# Altium PCB PCB2.PcbDoc (part 4 of 4)
Units mm, origin at the board's own origin, x right, y up, seen from the top; angles counter-clockwise.
Board outline 100 x 100 mm, 4 copper layers (TOP-SIG, GND1, GND2, BOT-SIG), stack 1.586 mm thick; 331 components, 152 nets, 869 pads, 934 vias.
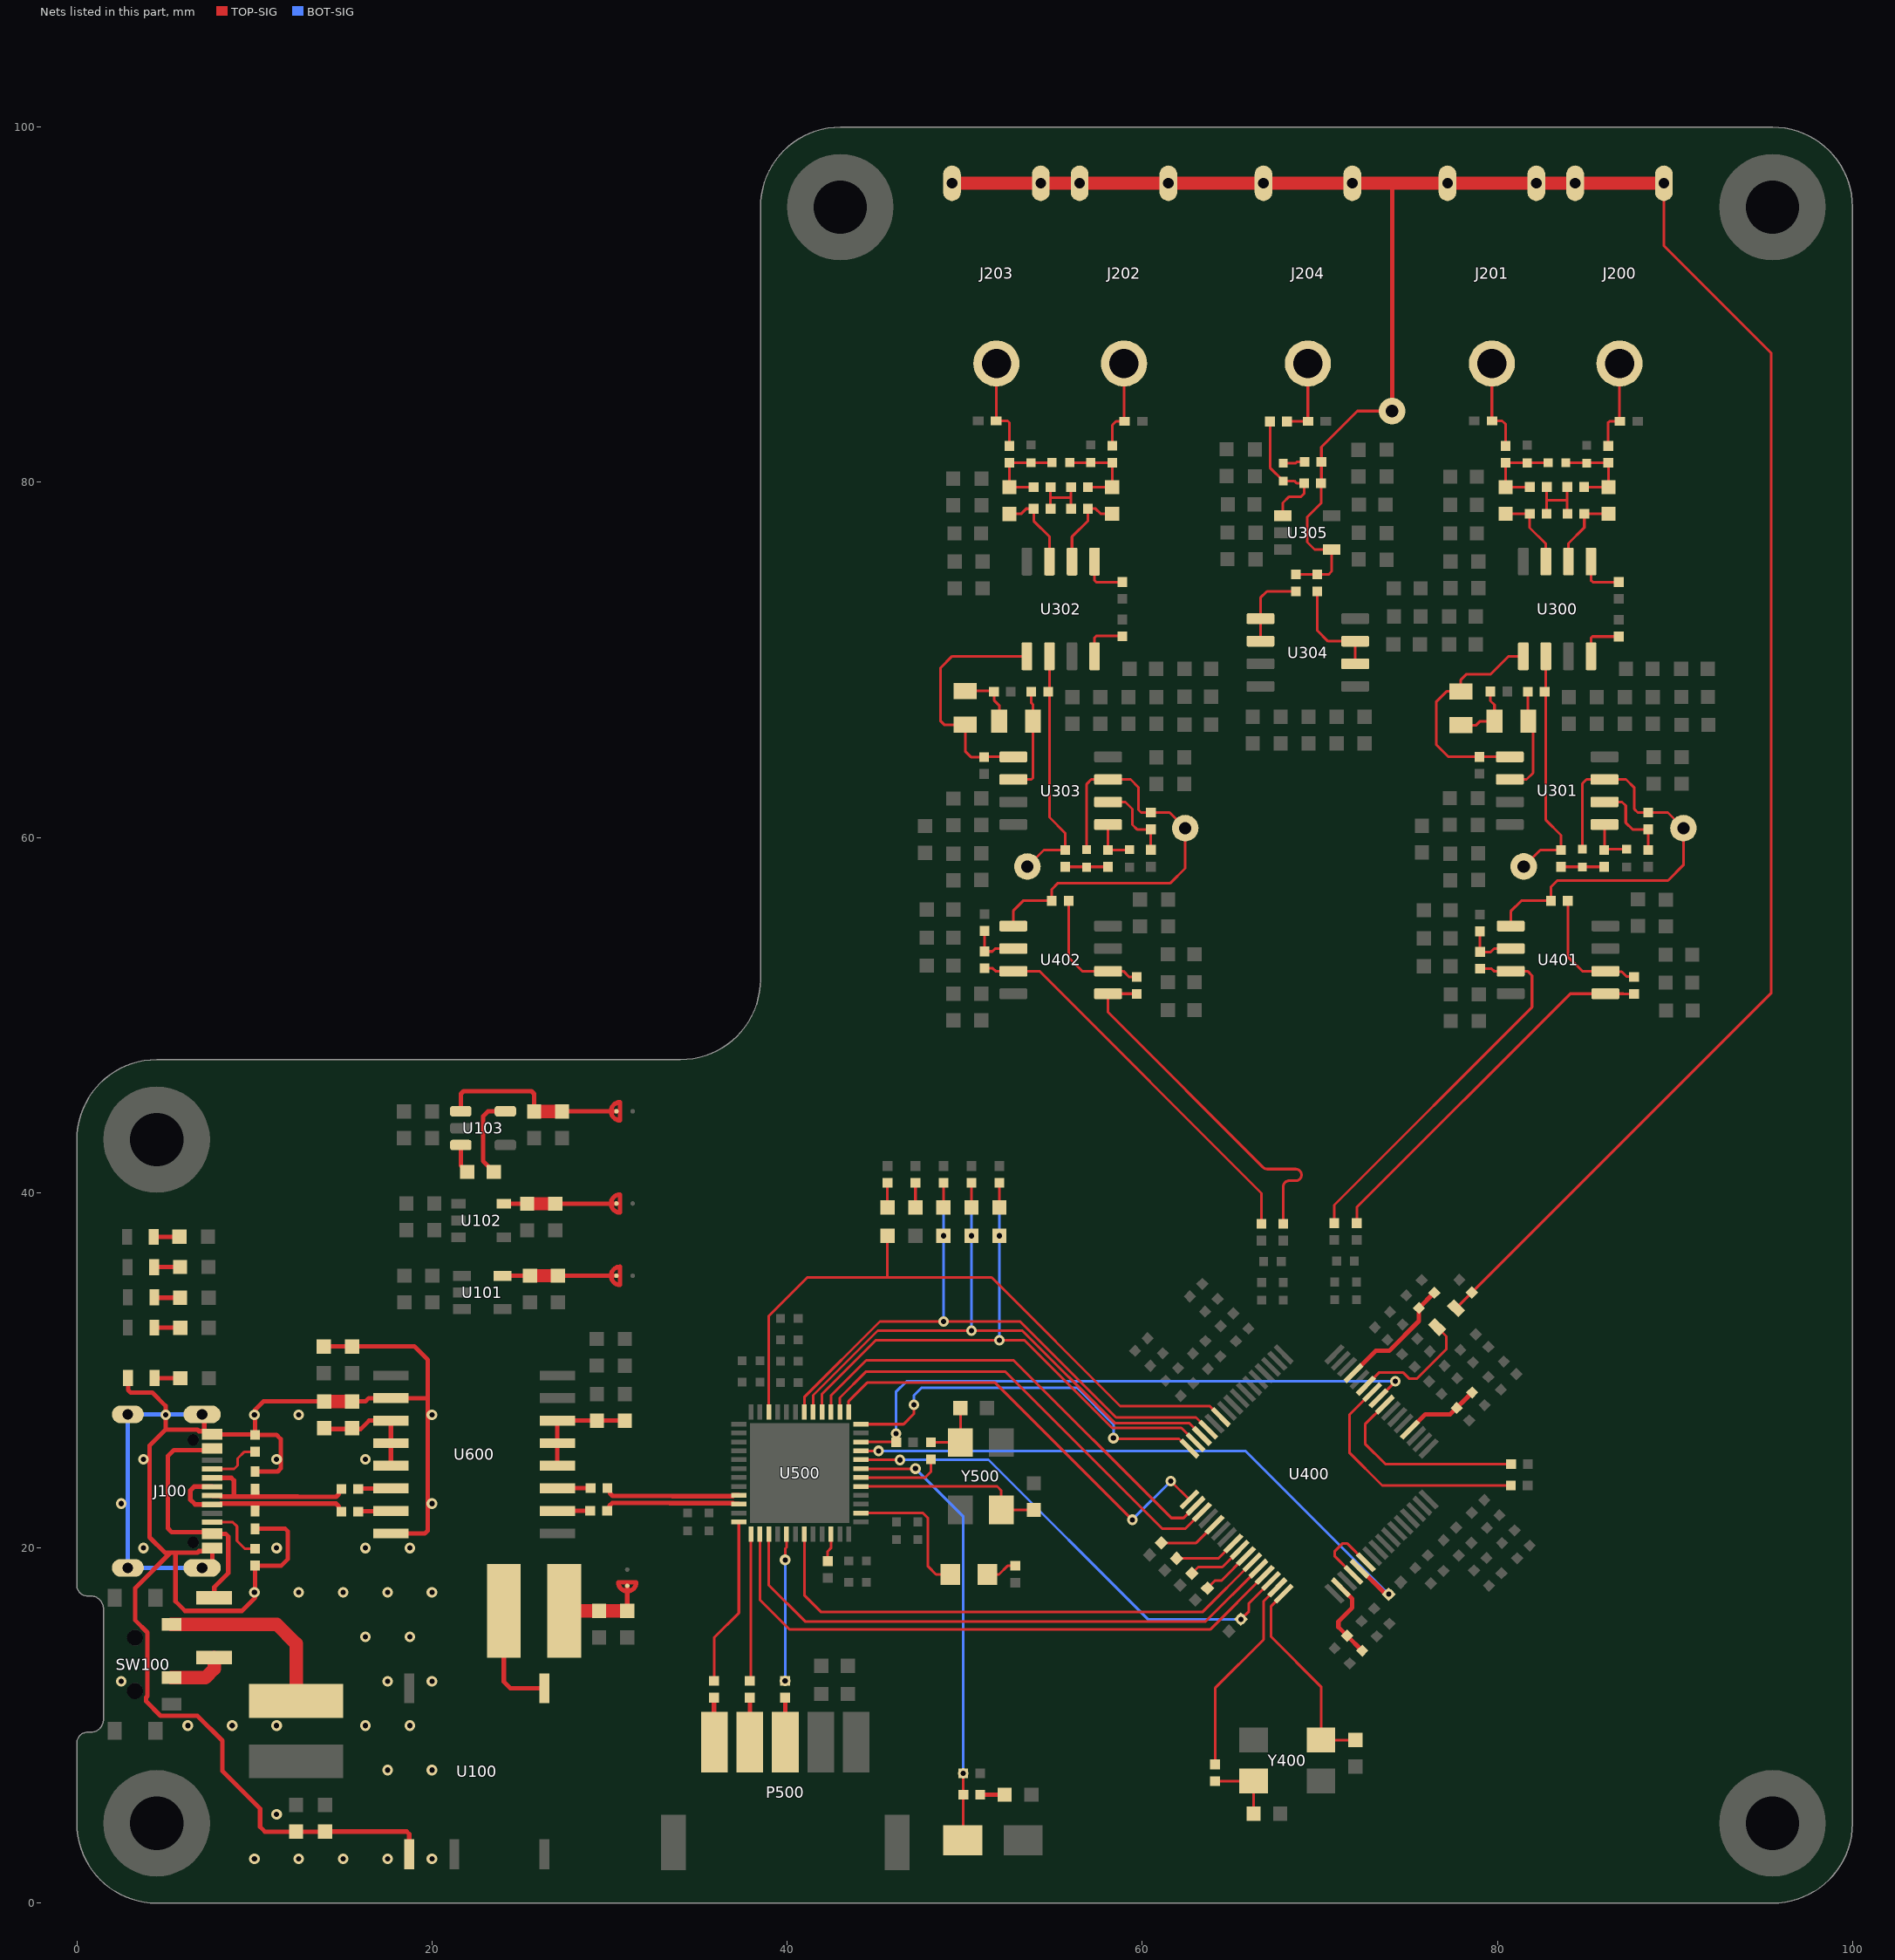
[diagram p5: the nets of this part, all layers, seen from the top]

## Via types
v1: diameter 0.6, hole 0.3, TOP-SIG to BOT-SIG, tented both sides, 598 vias
v2: diameter 0.6, hole 0.3, TOP-SIG to BOT-SIG, 296 vias
v3: diameter 0.6, hole 0.6, TOP-SIG to BOT-SIG, 40 vias

## Nets (pads, with @x,y where several pads share a name; then routed paths per layer and width w, separated by ;. In a path a pad name is that pad's centre, name@x,y a point inside that pad or via, vN(x,y) a via of type N, cw(c..) or ccw(c..) an arc to the next point about the centre after c; other vN are vias at no path point) (continued)
GPIO1_MODE1: D401.1 U400.13 U500.18 | length 34.1
  TOP-SIG w0.15: U500.18@40.97,27.655 40.97,28.494 45.226,32.75 v2(48.82,32.75) 53.13,32.75 58.53,27.35 63.031,27.35 U400.13@63.72,26.661
  BOT-SIG w0.15: v2(48.805,37.58) v2@48.82,37.565 ; v2(48.82,32.75) 48.82,38.995
GPIO2_MODE2: D402.1 U400.14 U500.17 | length 33.6
  TOP-SIG w0.15: U500.17@41.47,27.655 41.47,28.605 45.105,32.24 v2(50.38,32.24) ; v2@50.38,32.25 50.39,32.24 53.251,32.24 58.451,27.04 62.634,27.04 U400.14@63.366,26.308
  BOT-SIG w0.15: v2(50.38,32.24) 50.38,39.01
  other v2: 50.38,37.58
GPIO3_MODE3: D403.1 U400.15 U500.16 | length 33
  TOP-SIG w0.15: U500.16@41.97,27.655 41.97,28.68 44.99,31.7 v2(51.95,31.7) 53.37,31.7 58.31,26.76 62.206,26.76 U400.15@63.012,25.954
  BOT-SIG w0.15: v2(51.95,31.7) 51.95,39.005 ; v2@51.95,37.575 v2(51.955,37.58)
GPIO4_FILTER: D404.1 U400.11 U500.22 | length 37.4
  TOP-SIG w0.15: U500.22@38.97,27.655 38.97,33.061 41.139,35.23 45.65,35.23 ; D404.1@45.656,37.58 45.656,35.236 45.65,35.23 ; U400.11@64.427,27.368 63.805,27.99 58.76,27.99 51.52,35.23 45.65,35.23
MCU_CHECK_6: D500.2 U500.2 | length 8.1
  TOP-SIG w0.15: U500.2@44.155,21.97 47.647,21.97 47.94,21.677 47.94,18.96 48.39,18.51 D500.2@49.19,18.51
MCU_USB_D_N: R601.2 U500.33 | length 7.7
  TOP-SIG w0.263: R601.2@29.884,23.37 30.028,23.226 30.028,23.084 30.182,22.93 33.539,22.93 33.554,22.915 36.935,22.915 36.99,22.97 U500.33@37.285,22.97
MCU_USB_D_P: R602.2 U500.34 | length 7.7
  TOP-SIG w0.263: R602.2@29.864,22.1 30.008,22.244 30.008,22.386 30.162,22.54 33.377,22.54 33.392,22.525 36.935,22.525 36.99,22.47 U500.34@37.285,22.47
NetC102_2: C102.2 C103.2 L101.2 SB100.2 | length 5
  TOP-SIG w0.25: C102.2@31,16.46 SB100.2@31,17.873
  TOP-SIG w0.75: L101.2@27.449,16.462 27.451,16.46 29.415,16.46 C102.2@31,16.46
NetC106_2: C106.2 C107.2 SB101.2 U101.5 | length 6.4
  TOP-SIG w0.25: C106.2@27.1,35.33 30.386,35.33 SB101.2@30.389,35.327
  TOP-SIG w0.254: U101.5@23.976,35.329 25.524,35.328 C107.2@25.525,35.33
  TOP-SIG w0.75: C107.2@25.525,35.33 C106.2@27.1,35.33
NetC110_2: C110.2 C111.2 SB102.2 U102.5 | length 6.3
  TOP-SIG w0.25: U102.5@24.051,39.391 25.357,39.391 C110.2@25.367,39.382 ; C111.2@26.941,39.382 29.918,39.382 30.358,39.382 30.373,39.397 SB102.2@30.39,39.397
  TOP-SIG w0.75: C110.2@25.367,39.382 C111.2@26.941,39.382
NetC112_1: C112.1 U103.3 | length 1.7
  TOP-SIG w0.25: U103.3@21.625,42.689 21.625,41.539 C112.1@21.988,41.176
NetC112_2: C112.2 U103.5 | length 4.8
  TOP-SIG w0.25: C112.2@23.488,41.176 22.88,41.784 22.88,44.31 23.159,44.589 U103.5@24.135,44.589
NetC115_2: C115.2 C116.2 SB103.2 U103.1 | length 10.8
  TOP-SIG w0.25: U103.1@21.625,44.589 21.625,45.569 21.772,45.715 25.61,45.715 25.756,45.569 C115.2@25.756,44.58 ; C116.2@27.343,44.59 SB103.2@30.39,44.59
  TOP-SIG w0.75: C115.2@25.757,44.579 C116.2@27.331,44.579
NetC300_1: C300.1 R301.2 U300.3 | length 4.4
  TOP-SIG w0.15: C300.1@80.461,78.227 81.82,78.227 81.82,77.45 82.733,76.537 U300.3@82.733,75.542
NetC300_2: C300.2 C302.2 C303.2 R201.2 R300.2 | length 5.2
  TOP-SIG w0.15: R300.2@81.833,79.74 80.475,79.74 C300.2@80.461,79.727 R201.2@80.461,81.103 82.85,81.103 C303.2@82.857,81.097
NetC301_1: C301.1 R302.2 R303.1 | length 2.4
  TOP-SIG w0.15: R302.2@83.588,58.353 R303.1@86.009,58.354
NetC301_2: C301.2 R311.2 R402.1 TP301.1 U301.7 U401.5 | length 25.5
  TOP-SIG w0.15: U401.5@80.752,55.019 80.752,55.842 81.351,56.441 R402.1@83.02,56.441 83.02,57.23 83.37,57.58 89.61,57.58 90.48,58.45 TP301.1@90.48,60.53 89.598,61.412 R311.2@88.499,61.412 87.908,61.412 87.72,61.6 87.72,62.8 87.246,63.274 U301.7@86.035,63.274 85.024,63.274 84.792,63.042 C301.2@84.792,59.346
NetC303_1: C303.1 C304.1 C306.2 R200.2 R305.1 | length 5.2
  TOP-SIG w0.15: C303.1@83.857,81.097 83.863,81.103 R200.2@86.252,81.103 86.252,79.738 C306.2@86.263,79.727 84.901,79.727 R305.1@84.888,79.74
NetC305_2: C305.2 R303.2 U301.5 | length 2.7
  TOP-SIG w0.15: U301.5@86.035,60.734 86.035,59.329 R303.2@86.009,59.304 86.052,59.346 C305.2@87.277,59.346
NetC306_1: C306.1 R306.1 U300.2 | length 4.4
  TOP-SIG w0.15: U300.2@84.003,75.542 84.003,76.563 84.899,77.459 R306.1@84.899,78.237 86.253,78.237 C306.1@86.263,78.227
NetC307_1: C307.1 R307.2 U300.5 U301.1 | length 13.2
  TOP-SIG w0.15: U301.1@80.701,64.544 R307.2@78.999,64.544 77.246,64.544 76.57,65.22 76.57,67.66 77.142,68.232 C307.1@77.944,68.232 77.944,68.882 78.262,69.2 79.63,69.2 80.638,70.208 U300.5@81.463,70.208
NetC307_2: C307.2 C308.1 R309.2 | length 3.8
  TOP-SIG w0.15: C307.2@77.944,66.332 78.812,66.332 79.03,66.55 C308.1@79.839,66.55 79.839,67.471 79.609,67.701 R309.2@79.609,68.227
NetC308_2: C308.2 R304.1 U301.2 | length 6.2
  TOP-SIG w0.15: U301.2@80.701,63.274 81.644,63.274 82.01,63.64 82.01,66.279 C308.2@81.739,66.55 81.713,66.576 R304.1@81.713,68.22
NetC309_1: C309.1 R314.2 U302.3 | length 4.8
  TOP-SIG w0.15: C309.1@52.523,78.226 53.174,78.226 53.463,78.515 53.884,78.515 R314.2@53.888,78.518 53.888,77.832 54.776,76.944 U302.3@54.776,75.541
NetC309_2: C309.2 C311.2 C312.2 R203.2 R313.2 | length 5.1
  TOP-SIG w0.15: R313.2@53.888,79.723 53.885,79.726 C309.2@52.523,79.726 R203.2@52.523,81.103 54.901,81.103 C312.2@54.918,81.12
NetC310_1: C310.1 R315.2 R316.1 | length 2.4
  TOP-SIG w0.15: R315.2@55.669,58.353 R316.1@58.078,58.353
NetC310_2: C310.2 R324.2 R408.1 TP303.1 U303.7 U402.5 | length 26.1
  TOP-SIG w0.15: U402.5@53.369,55.243 53.144,55.018 U402.5@52.744,55.018 52.744,55.894 52.774,55.924 53.29,56.44 R408.1@54.91,56.44 54.91,57.09 55.26,57.44 61.59,57.44 62.421,58.271 TP303.1@62.421,60.53 61.54,61.411 R324.2@60.487,61.411 59.939,61.411 59.79,61.56 59.79,62.83 59.347,63.273 U303.7@58.078,63.273 57.133,63.273 56.873,63.013 C310.2@56.873,59.328
NetC312_1: C312.1 C313.1 C315.2 R202.2 R318.1 | length 5.2
  TOP-SIG w0.15: C312.1@55.918,81.12 55.932,81.107 R202.2@58.314,81.107 58.314,79.733 58.305,79.723 R318.1@56.943,79.723
NetC314_2: C314.2 R316.2 U303.5 | length 2.6
  TOP-SIG w0.15: U303.5@58.078,60.733 R316.2@58.078,59.303 59.257,59.303 C314.2@59.282,59.328
NetC315_1: C315.1 R319.1 U302.2 | length 4.8
  TOP-SIG w0.15: U302.2@56.046,75.541 56.046,76.936 56.946,77.836 R319.1@56.946,78.518 57.371,78.518 57.66,78.23 C315.1@58.311,78.23
NetC316_1: C316.1 R320.2 U302.5 U303.1 | length 13.9
  TOP-SIG w0.15: U303.1@52.744,64.543 51.1,64.543 R320.2@51.093,64.535 50.355,64.535 50.033,64.857 C316.1@50.033,66.352 48.848,66.352 48.65,66.55 48.65,69.56 49.297,70.207 U302.5@53.506,70.207
NetC316_2: C316.2 C317.1 R322.2 | length 3.4
  TOP-SIG w0.15: C316.2@50.033,68.252 51.452,68.252 51.527,68.177 51.527,68.094 51.577,68.094 51.652,68.019 51.652,67.738 51.946,67.444 C317.1@51.946,66.55
NetC317_2: C317.2 R317.1 U303.2 | length 6
  TOP-SIG w0.15: U303.2@52.744,63.273 53.758,63.273 53.846,63.361 C317.2@53.846,66.55 53.846,67.494 53.756,67.584 R317.1@53.756,68.219
NetC318_1: C318.1 R204.2 R328.1 U305.1 | length 7.6
  TOP-SIG w0.15: R204.2@67.197,83.428 67.197,80.824 C318.1@67.941,80.081 68.562,80.081 68.696,79.947 R328.1@69.121,79.947 69.121,79.371 68.95,79.2 68.28,79.2 67.921,78.841 U305.1@67.921,78.117
NetC318_2: C318.2 R326.1 | length 1.2
  TOP-SIG w0.15: C318.2@67.941,81.081 68.646,81.081 68.717,81.152 R326.1@69.142,81.152
NetC405_2: C405.2 C406.1 U400.52 | length 4.4
  TOP-SIG w0.25: U400.52@75.074,26.661 75.942,27.53 77.353,27.53 C405.2@78.576,28.754
NetC408_2: C408.2 C409.1 U400.61 | length 6.9
  TOP-SIG w0.25: U400.61@71.892,29.843 73.161,31.113 73.917,31.113 75.581,32.777 C409.1@75.581,33.514 75.586,33.514 76.444,34.373 C408.2@76.45,34.373
NetC410_2: C410.2 C411.1 U400.34 | length 4.7
  TOP-SIG w0.25: U400.34@71.184,17.782 71.83,17.136 71.83,16.64 71.05,15.86 71.05,15.554 C411.1@71.541,15.063 71.543,15.063 72.392,14.215 C410.2@72.395,14.215
NetC413_2: C413.2 R427.1 Y400.1 | length 3.8
  TOP-SIG w0.15: R427.1@64.349,6.881 Y400.1@66.271,6.881 66.268,6.878 C413.2@66.268,5.042
NetC414_2: C414.2 U400.32 Y400.3 | length 11.6
  TOP-SIG w0.15: U400.32@67.962,17.428 67.26,16.726 67.26,15 70.071,12.189 Y400.3@70.071,9.181 71.998,9.181 C414.2@72.011,9.194
NetC500_2: C500.2 U500.5 Y500.1 | length 10.9
  TOP-SIG w0.15: U500.5@44.155,23.47 51.83,23.47 52.058,23.242 Y500.1@52.058,22.145 C500.2@53.898,22.145
NetC501_2: C501.2 R501.2 Y500.3 | length 3.6
  TOP-SIG w0.15: R501.2@48.104,25.949 49.77,25.949 C501.2@49.77,27.853
NetC502_1: C502.1 R503.2 | length 1.4
  TOP-SIG w0.25: R503.2@50.881,6.115 52.251,6.115 C502.1@52.256,6.11
NetD100_1: D100.1 R100.1 | length 1.5
  TOP-SIG w0.25: R100.1@4.372,32.406 4.377,32.401 D100.1@5.824,32.401
NetD101_1: D101.1 R103.2 | length 1.4
  TOP-SIG w0.25: R103.2@4.298,29.563 D101.1@5.742,29.563
NetD102_1: D102.1 R104.1 | length 1.5
  TOP-SIG w0.25: R104.1@4.368,34.111 4.389,34.09 D102.1@5.821,34.09
NetD103_1: D103.1 R105.1 | length 1.5
  TOP-SIG w0.25: R105.1@4.359,35.816 4.369,35.826 D103.1@5.811,35.826
NetD104_1: D104.1 R106.1 | length 1.5
  TOP-SIG w0.25: R106.1@4.332,37.521 5.778,37.521 D104.1@5.784,37.526
NetD200_1: D200.1 J200.2 R200.1 | length 5.3
  TOP-SIG w0.15: R200.1@86.252,82.053 86.231,82.074 86.231,83.353 86.319,83.441 D200.1@86.906,83.441 86.881,83.466 J200.2@86.881,86.692
NetD201_1: D201.1 J201.2 R201.1 | length 5.3
  TOP-SIG w0.15: J201.2@79.693,86.692 79.693,83.476 D201.1@79.702,83.467 80.273,83.467 80.461,83.279 R201.1@80.461,82.053
NetD202_1: D202.1 J202.2 R202.1 | length 5.2
  TOP-SIG w0.15: R202.1@58.314,82.057 58.314,83.224 58.531,83.441 D202.1@59.009,83.441 58.975,83.474 J202.2@58.975,86.691
NetD203_1: D203.1 J203.2 R203.1 | length 5.3
  TOP-SIG w0.15: J203.2@51.787,86.691 51.787,83.482 D203.1@51.771,83.466 52.424,83.466 52.523,83.367 R203.1@52.523,82.053
NetD204_1: D204.1 J204.2 R204.1 | length 4.5
  TOP-SIG w0.15: R204.1@68.147,83.428 68.16,83.44 D204.1@69.34,83.44 69.33,83.45 J204.2@69.33,86.692
NetD400_2: D400.2 R422.1 | length 1.4
  TOP-SIG w0.15: D400.2@47.23,39.18 R422.1@47.23,40.557
NetD401_2: D401.2 R423.1 | length 1.4
  TOP-SIG w0.15: D401.2@48.805,39.18 48.805,40.553 R423.1@48.81,40.558
NetD402_2: D402.2 R424.1 | length 1.4
  TOP-SIG w0.15: D402.2@50.38,39.18 R424.1@50.38,40.558
NetD403_2: D403.2 R425.1 | length 1.4
  TOP-SIG w0.15: D403.2@51.955,39.18 51.955,40.552 R425.1@51.961,40.558
NetD404_2: D404.2 R426.1 | length 1.4
  TOP-SIG w0.15: D404.2@45.656,39.18 45.656,40.553 R426.1@45.66,40.558
NetD500_1: D500.1 R504.1 | length 1.8
  TOP-SIG w0.15: D500.1@51.29,18.51 51.93,18.51 52.415,18.995 R504.1@52.849,18.995
NetF100_0: F100.0 J100.A4_B9 J100.B4_A9 | length 14.1
  TOP-SIG w0.25: J100.A4_B9@7.63,25.602 7.545,25.517 5.467,25.517 5.127,25.177 5.127,21.113 5.353,20.887 7.545,20.887 J100.B4_A9@7.63,20.802 8.382,20.802 8.528,20.656 8.528,18.582 7.744,17.798 7.744,17.202 F100.0@7.731,17.189
NetF100_1: F100.1 SW100.COM | length 3.3
  TOP-SIG w0.75: SW100.COM@5.33,12.7 7.243,12.7 7.744,13.201 7.744,13.83 7.738,13.836 F100.1@7.731,13.836
NetJ100_A5: J100.A5 R102.2 | length 3
  TOP-SIG w0.15: J100.A5@7.63,24.452 8.862,24.452 9.06,24.65 9.06,25.04 9.44,25.42 R102.2@10.04,25.42
NetJ100_B5: J100.B5 R101.2 | length 3.5
  TOP-SIG w0.15: J100.B5@7.63,21.452 8.788,21.452 9.02,21.22 9.02,20.4 9.46,19.96 R101.2@10.04,19.96
NetL100_1: L100.1 SW100.L1 | length 10.7
  TOP-SIG w0.75: SW100.L1@5.33,15.7 11.27,15.7 12.354,14.616 L100.1@12.354,11.393
NetL101_1: L101.1 U100.8 | length 6.4
  TOP-SIG w0.25: L101.1@24.049,16.462 24.049,12.471 24.416,12.104 U100.8@26.34,12.104
NetP500_1: P500.1 R505.2 | length 2.5
  TOP-SIG w0.25: R505.2@35.886,11.576 35.886,9.084 P500.1@35.9,9.07
NetP500_2: P500.2 R506.2 | length 2.5
  TOP-SIG w0.25: P500.2@37.9,9.07 37.902,9.072 R506.2@37.902,11.576
NetP500_3: P500.3 R507.2 | length 2.5
  TOP-SIG w0.25: R507.2@39.89,11.576 39.89,9.08 P500.3@39.9,9.07
NetR300_1: R300.1 R301.1 R305.2 R306.2 | length 4.2
  TOP-SIG w0.15: R301.1@82.781,78.237 82.783,78.239 82.783,78.99 ; R300.1@82.783,79.74 82.783,78.99 ; R305.2@83.938,79.74 83.938,78.994 ; R306.2@83.949,78.237 83.938,78.248 83.938,78.994 ; 82.783,78.99 83.933,78.99 83.938,78.994
NetR302_1: R302.1 R304.2 TP300.1 U300.6 | length 13.7
  TOP-SIG w0.15: TP300.1@81.488,58.371 82.42,59.303 R302.1@83.588,59.303 83.588,60.132 82.733,60.987 U300.6@82.733,70.208
NetR308_2: R308.2 U300.8 | length 2.6
  TOP-SIG w0.15: U300.8@85.273,70.208 85.273,71.232 85.361,71.32 R308.2@86.837,71.32
NetR310_2: R310.2 U300.1 | length 2.7
  TOP-SIG w0.15: U300.1@85.273,75.542 85.273,74.487 85.373,74.387 R310.2@86.837,74.387
NetR311_1: R311.1 R312.2 U301.6 | length 4.8
  TOP-SIG w0.15: U301.6@86.035,62.004 87.026,62.004 87.23,61.8 87.23,60.84 87.608,60.462 R311.1@88.499,60.462 88.501,60.46 R312.2@88.501,59.304
NetR313_1: R313.1 R314.1 R318.2 R319.2 | length 3.6
  TOP-SIG w0.15: R314.1@54.838,78.518 54.838,79.13 ; R313.1@54.838,79.723 54.838,79.13 ; R318.2@55.993,79.723 55.993,79.12 ; R319.2@55.996,78.518 55.993,78.522 55.993,79.12 ; 54.838,79.13 55.983,79.13 55.993,79.12
NetR315_1: R315.1 R317.2 TP302.1 U302.6 | length 13.8
  TOP-SIG w0.15: TP302.1@53.531,58.371 54.463,59.303 R315.1@55.669,59.303 55.669,60.251 54.776,61.144 54.776,68.219 U302.6@54.776,70.207
NetR321_2: R321.2 U302.8 | length 2.7
  TOP-SIG w0.15: U302.8@57.316,70.207 57.316,71.258 57.404,71.346 58.865,71.346 R321.2@58.88,71.331
NetR323_2: R323.2 U302.1 | length 2.7
  TOP-SIG w0.15: U302.1@57.316,75.541 57.316,74.474 57.404,74.386 R323.2@58.88,74.386
NetR324_1: R324.1 R325.2 U303.6 | length 4.7
  TOP-SIG w0.15: U303.6@58.078,62.003 59.053,62.003 59.45,61.606 59.45,60.72 59.709,60.461 R324.1@60.487,60.461 R325.2@60.487,59.306
NetR327_2: R327.2 U304.1 U304.2 | length 4.6
  TOP-SIG w0.15: U304.2@66.659,71.054 U304.1@66.659,72.324 66.659,73.499 67.023,73.863 R327.2@68.65,73.863
NetR329_2: R329.2 U304.6 U304.7 | length 5.9
  TOP-SIG w0.15: R329.2@69.861,73.863 69.861,71.659 70.466,71.054 U304.7@71.993,71.054 U304.6@71.993,69.784
NetR400_1: R400.1 R402.2 U401.2 | length 7.4
  TOP-SIG w0.15: R402.2@83.97,56.441 83.97,53.3 84.791,52.479 U401.2@86.086,52.479 86.112,52.452 87.008,52.452 87.289,52.171 87.677,52.171 R400.1@87.702,52.146
NetR400_2: R400.2 R401.1 U401.1 | length 21.5
  TOP-SIG w0.15: R401.1@72.085,38.288 72.085,39.185 84.109,51.209 U401.1@86.086,51.209 87.101,51.209 87.114,51.196 R400.2@87.702,51.196 R400.2@87.689,51.209
NetR403_1: R403.1 R405.2 U401.7 | length 21.6
  TOP-SIG w0.15: R403.1@70.815,38.288 70.815,39.312 81.951,50.449 81.951,52.229 81.701,52.479 U401.7@80.752,52.479 79.811,52.479 79.677,52.613 R405.2@79.026,52.613
NetR404_2: R404.2 R405.1 U401.6 | length 3
  TOP-SIG w0.15: R404.2@79.02,54.72 79.026,54.714 R405.1@79.026,53.563 79.633,53.563 79.819,53.749 U401.6@80.752,53.749
NetR406_1: R406.1 R408.2 U402.2 | length 7.5
  TOP-SIG w0.15: R408.2@55.86,56.44 55.86,53.24 56.622,52.478 U402.2@58.078,52.478 58.08,52.48 58.94,52.48 59.274,52.146 R406.1@59.694,52.146
NetR406_2: R406.2 R407.1 U402.1 | length 20.9
  TOP-SIG w0.15: R406.2@59.694,51.196 59.681,51.208 U402.1@58.078,51.208 58.078,50.162 66.808,41.432 ccw(c67.041,41.665) 67.041,41.336 68.643,41.336 cw(c68.643,41.007) 68.972,41.007 cw(c68.643,41.007) 68.643,40.678 68.271,40.678 ccw(c68.271,40.349) 67.942,40.349 67.942,38.3 R407.1@67.942,38.258
NetR409_1: R409.1 R411.2 U402.7 | length 22.5
  TOP-SIG w0.15: R411.2@51.128,52.639 51.581,52.639 51.742,52.478 U402.7@52.744,52.478 54.212,52.478 66.714,39.976 R409.1@66.714,38.258
NetR410_2: R410.2 R411.1 U402.6 | length 2.8
  TOP-SIG w0.15: R410.2@51.128,54.746 R411.1@51.128,53.589 51.559,53.589 51.718,53.748 U402.6@52.744,53.748
NetR412_2: R412.2 U400.59 | length 7.1
  TOP-SIG w0.15: U400.59@72.599,29.136 73.353,29.89 74.68,29.89 75.025,29.545 75.481,29.545 77.13,31.194 77.13,31.916 R412.2@76.608,32.438
NetR413_2: R413.2 U400.37 U500.9 | length 35.3
  TOP-SIG w0.15: U500.9@44.155,25.47 v2(45.16,25.47)
  TOP-SIG w0.25: U400.37@72.245,18.843 72.266,18.843 73.708,17.4 v2(73.882,17.4)
  BOT-SIG w0.15: v2(45.16,25.47) 45.17,25.46 46.89,25.46 46.892,25.457 65.825,25.457 v2(73.882,17.4)
NetR414_2: R414.2 U400.30 U500.8 | length 28
  TOP-SIG w0.15: U500.8@44.155,24.97 46.348,24.97 v2(46.36,24.958) ; v2(65.56,15.99) 66.01,16.44 66.01,16.89 U400.30@67.255,18.136
  BOT-SIG w0.15: v2(46.36,24.958) 46.362,24.96 46.997,24.96 47.007,24.97 51.344,24.97 60.324,15.99 v2(65.56,15.99)
NetR415_2: R415.2 U400.26 | length 2.9
  TOP-SIG w0.15: R415.2@63.672,17.742 64.09,18.16 64.451,18.16 U400.26@65.841,19.55
NetR416_2: R416.2 U400.25 | length 3.2
  TOP-SIG w0.15: R416.2@62.807,18.581 63.156,18.93 64.514,18.93 U400.25@65.487,19.903
NetR417_2: R417.2 U400.56 | length 11.4
  TOP-SIG w0.15: U400.56@73.659,28.075 72.55,26.966 72.55,25.87 73.69,24.73 R417.2@80.77,24.73
NetR418_2: R418.2 U400.24 | length 3.5
  TOP-SIG w0.15: R418.2@61.94,19.418 64.295,19.418 U400.24@65.134,20.257
NetR419_2: R419.2 U400.21 | length 3.4
  TOP-SIG w0.15: R419.2@61.083,20.286 63.042,20.286 U400.21@64.073,21.318
NetR420_2: R420.2 U400.57 U500.10 | length 34.6
  TOP-SIG w0.15: U500.10@44.155,25.97 46.137,25.97 R420.2@46.149,25.957 46.13,25.977 v2(46.13,26.44) ; U400.57@73.306,28.429 74.26,29.383 v2(74.26,29.39)
  BOT-SIG w0.15: v2(46.13,26.44) 46.13,28.787 46.733,29.39 v2(74.26,29.39)
NetR421_1: R421.1 U400.58 | length 13.8
  TOP-SIG w0.15: U400.58@72.952,28.782 71.67,27.5 71.67,25.37 73.515,23.525 R421.1@80.761,23.525
NetR427_2: R427.2 U400.31 | length 11.4
  TOP-SIG w0.15: R427.2@64.102,7.82 64.102,12.112 66.833,14.843 66.833,17.007 U400.31@67.609,17.782
NetR500_1: R500.1 U500.46 | length 1.6
  TOP-SIG w0.15: R500.1@42.29,19.26 42.29,19.81 42.47,19.99 U500.46@42.47,20.785
NetR501_1: R501.1 U500.6 | length 4.8
  TOP-SIG w0.15: U500.6@44.155,23.97 47.78,23.97 48.104,24.294 R501.1@48.104,24.999
NetR600_2: R600.2 U600.6 | length 1.9
  TOP-SIG w0.15: R600.2@15.842,23.354 R600.2@15.848,23.36
  TOP-SIG w0.25: R600.2@15.845,23.33 15.86,23.345 17.674,23.345 U600.6@17.689,23.36
NetR601_1: R601.1 U600.11 | length 1.9
  TOP-SIG w0.25: U600.11@27.062,23.36 27.067,23.365 28.929,23.365 R601.1@28.934,23.37
NetR602_1: R602.1 U600.10 | length 1.9
  TOP-SIG w0.25: U600.10@27.062,22.09 27.067,22.095 28.909,22.095 R602.1@28.914,22.1
NetR603_2: R603.2 U600.7 | length 1.9
  TOP-SIG w0.15: R603.2@15.842,22.074 R603.2@15.858,22.09
  TOP-SIG w0.25: R603.2@15.845,22.05 15.865,22.07 17.669,22.07 U600.7@17.689,22.09
NetU400_16: U400.16 U500.12 | length 21.8
  TOP-SIG w0.15: U500.12@44.155,26.97 46.56,26.97 47.135,27.545 47.135,28.065 v2(47.14,28.07) ; v2(58.38,26.19) 58.423,26.147 62.071,26.147 62.618,25.6 U400.16@62.659,25.6
  BOT-SIG w0.15: v2(47.14,28.07) 47.145,28.075 47.145,28.595 47.57,29.02 56.33,29.02 58.38,26.97 v2(58.38,26.19)
NetU400_17: U400.17 U500.13 | length 24.8
  TOP-SIG w0.15: U500.13@43.47,27.655 43.47,28.27 44.51,29.31 51.72,29.31 v2(59.44,21.59) ; v2(61.61,23.77) 62.648,22.732 U400.17@62.659,22.732
  BOT-SIG w0.15: v2(59.44,21.59) 61.61,23.76 v2(61.61,23.77)
NetU400_18: U400.18 U500.15 | length 26.3
  TOP-SIG w0.15: U500.15@42.47,27.655 42.47,28.58 44.46,30.57 52.76,30.57 61.64,21.69 62.324,21.69 U400.18@63.012,22.378
NetU400_19: U400.19 U500.14 | length 25.9
  TOP-SIG w0.15: U500.14@42.97,27.655 42.97,28.46 44.45,29.94 52.28,29.94 61.14,21.08 62.421,21.08 U400.19@63.366,22.025
NetU400_27: U400.27 U500.43 | length 30.2
  TOP-SIG w0.15: U500.43@40.97,20.785 40.97,17.34 41.92,16.39 63.388,16.39 U400.27@66.194,19.196
NetU400_28: U400.28 U500.39 | length 32.5
  TOP-SIG w0.15: U500.39@38.97,20.785 38.97,17.91 41.01,15.87 63.575,15.87 U400.28@66.548,18.843
NetU400_29: U400.29 U500.38 | length 34.1
  TOP-SIG w0.15: U500.38@38.47,20.785 38.47,17.09 40.149,15.411 63.823,15.411 U400.29@66.902,18.489
NetU400_36: U400.36 U400.38 | length 4.2
  TOP-SIG w0.15: U400.36@71.892,18.489 70.83,19.551 70.83,19.8 71.29,20.26 71.535,20.26 U400.38@72.599,19.196
R\S\T\_6: R502.2 R503.1 SW500.1 U500.7 | length 25.1
  TOP-SIG w0.15: U500.7@44.155,24.47 44.167,24.458 47.218,24.458 v2(47.23,24.47) ; SW500.1@49.896,3.542 49.925,3.572 v2(49.925,7.32)
  BOT-SIG w0.15: v2(47.23,24.47) 47.23,24.46 49.925,21.765 v2(49.925,7.32)
SHIELD: C412.2 J200.1 J200.3 J201.1 J201.3 J202.1 J202.3 J203.1 J203.3 J204.1 J204.3 R326.2 R327.1 R328.2 R329.1 R412.1 TP304.1 U305.4 | length 141.5
  TOP-SIG w0.15: R327.1@68.65,74.813 R329.1@69.861,74.813 70.493,74.813 70.671,74.991 U305.4@70.671,76.217 69.713,76.217 69.296,76.634 69.296,78.046 70.071,78.821 R328.2@70.071,79.947 70.092,79.968 R326.2@70.092,81.152 70.092,81.992 72.114,84.014 TP304.1@74.074,84.014 ; R412.1@77.669,33.498 77.674,33.498 C412.2@78.564,34.388 95.43,51.254 95.43,87.27 89.381,93.319 J200.3@89.381,96.842
  TOP-SIG w0.25: TP304.1@74.074,84.014 74.074,96.825 74.09,96.842
  TOP-SIG w0.75: J203.1@49.287,96.842 74.09,96.842 J200.3@89.381,96.842
SWCLK_6: R506.1 U500.37 | length 8.3
  TOP-SIG w0.15: R506.1@37.902,12.526 37.97,12.594 U500.37@37.97,20.785
SWDIO_6: R505.1 U500.36 | length 9.5
  TOP-SIG w0.15: R505.1@35.886,12.526 35.886,14.946 37.285,16.345 U500.36@37.285,21.47
SWDO_6: R507.1 U500.41 | length 8.3
  TOP-SIG w0.15: v2(39.89,19.33) 39.89,19.95 39.97,20.03 U500.41@39.97,20.785
  BOT-SIG w0.15: v2(39.89,12.526) v2(39.89,19.33)
USB_D_N: D600.1 J100.A7 J100.B7 R600.1 | length 10.2
  TOP-SIG w0.263: J100.A7@7.63,22.952 8.055,22.952 8.11,22.897 8.825,22.897 ; J100.B7@7.63,23.952 8.694,23.952 8.848,23.798 8.848,22.92 8.825,22.897 ; D600.1@10.038,23.311 10.156,23.193 10.156,22.888 ; 12.437,22.885 14.597,22.885 14.751,23.039 14.751,23.186 R600.1@14.895,23.33 ; 12.437,22.891 12.433,22.888 10.156,22.888 ; 8.825,22.897 9.54,22.897 9.549,22.888 10.156,22.888
USB_D_P: D601.1 J100.A6 J100.B6 R603.1 | length 11.2
  TOP-SIG w0.263: J100.A6@7.63,23.452 6.612,23.452 6.39,23.23 6.39,22.73 6.668,22.452 J100.B6@7.63,22.452 8.055,22.452 8.11,22.507 9.379,22.507 9.387,22.498 12.272,22.498 12.275,22.495 14.597,22.495 14.751,22.341 14.751,22.194 R603.1@14.895,22.05 ; D601.1@10.04,22.081 10.158,22.2 10.158,22.498
USB_GND: C100.1 C101.1 C601.1 C602.2 C605.2 C606.1 D600.2 D601.2 J100.A1_B12 J100.B1_A12 J100.SH1 J100.SH2 J100.SH3 J100.SH4 R101.1 R102.1 R103.1 U100.1 U600.2 U600.8 | length 119.3
  TOP-SIG w0.25: R103.1@2.798,29.563 2.885,29.476 2.885,28.895 3.031,28.749 4.251,28.749 4.997,28.003 4.997,26.667 ; J100.SH4@2.875,18.882 J100.SH4@2.901,18.882 ; J100.SH4@3.247,18.536 J100.SH4@2.901,18.882 ; J100.SH4@3.28,18.536 2.934,18.882 J100.SH4@2.901,18.882 ; J100.SH2@7.055,18.882 7.284,18.882 7.63,19.228 J100.B1_A12@7.63,20.002 7.455,19.827 6.883,19.827 6.793,19.737 5.56,19.737 ; J100.SH1@7.055,27.522 7.18,27.397 7.18,26.577 6.883,26.577 6.793,26.667 4.997,26.667 ; J100.A1_B12@7.63,26.402 7.646,26.386 10.024,26.386 R102.1@10.04,26.37 ; D600.2@10.038,24.311 11.311,24.311 11.48,24.48 11.48,26.14 11.25,26.37 R102.1@10.04,26.37 ; D601.2@10.04,21.081 11.743,21.081 11.889,20.935 11.889,19.379 11.52,19.01 R101.1@10.04,19.01 10.04,17.2 9.3,16.46 6.1,16.46 5.56,17 5.56,19.737 ; C602.2@13.91,31.347 15.503,31.347 C601.1@15.505,31.349 19.011,31.349 19.76,30.6 19.76,28.44 ; C606.1@13.925,28.25 10.51,28.25 10.04,27.78 R102.1@10.04,26.37 ; C100.1@13.979,4.03 C101.1@12.35,4.03 10.59,4.03 10.32,4.3 10.32,5.33 8.2,7.45 8.2,9.15 6.79,10.56 4.716,10.56 3.902,11.375 3.902,11.582 3.98,11.66 3.98,15.24 3.295,15.925 3.295,17.752 5.28,19.737 ; C100.1@13.984,4.035 18.574,4.035 18.72,3.888 U100.1@18.72,2.756 ; C605.2@15.5,28.25 16.25,28.25 16.44,28.44 U600.2@17.689,28.44 19.76,28.44 ; U600.8@17.689,20.82 19.6,20.82 19.76,20.98 19.76,28.44 ; 4.997,26.667 4.1,25.77 4.1,20.6 4.963,19.737 5.28,19.737 ; 5.28,19.737 5.56,19.737
  TOP-SIG w0.75: C606.1@13.925,28.25 C605.2@15.5,28.25
  BOT-SIG w0.25: J100.SH2@7.055,18.882 J100.SH4@2.875,18.882 J100.SH3@2.875,27.522 J100.SH1@7.055,27.522
  other v1: 10,2.5 12.5,2.5 15,2.5 17.5,2.5 20,2.5 11.25,5 17.5,7.5 20,7.5 6.25,10 8.75,10 11.25,10 16.25,10 18.75,10 2.5,12.5 17.5,12.5 20,12.5 16.25,15 18.75,15 10,17.5 12.5,17.5 15,17.5 17.5,17.5 20,17.5 3.75,20 11.25,20 16.25,20 18.75,20 2.5,22.5 20,22.5 3.75,25 11.25,25 16.25,25 5,27.5 10,27.5 12.5,27.5 20,27.5
VDD1: C605.1 C606.2 U600.3 U600.4 U600.5 | length 6.5
  TOP-SIG w0.25: C606.2@13.925,26.75 13.975,26.7 15.99,26.7 16.46,27.17 U600.3@17.689,27.17 U600.5@17.689,24.63
VDD2: C607.2 C608.1 U600.12 U600.13 U600.14 | length 6.3
  TOP-SIG w0.25: U600.12@27.062,24.63 U600.13@27.062,25.9 U600.14@27.062,27.17 30.862,27.17 C607.2@30.864,27.172
pads on no net: H100.0 H101.0 H102.0 H103.0 H?.0 J100. J100.A8 J100.B8 P500.MP1 P500.MP2 SW100.L2 SW100.M1 SW100.M2 SW100.M3 SW100.M4 SW100.M5 SW100.M6 U100.14 U101.4 U102.4 U400.22 U400.23 U500.3 U500.4 U500.11 U500.24 U500.25 U500.26 U500.27 U500.28 U500.29 U500.30 U500.31 U500.32 U500.40 U500.42 U500.44 U500.45 U500.47
copper on no net:
  other v3: 4.5,2.25 95.5,2.25 2.909,2.909 6.091,2.909 93.909,2.909 97.091,2.909 2.25,4.5 6.75,4.5 93.25,4.5 97.75,4.5 2.909,6.091 6.091,6.091 93.909,6.091 97.091,6.091 4.5,6.75 95.5,6.75 4.5,40.75 2.909,41.409 6.091,41.409 2.25,43 6.75,43 2.909,44.591 6.091,44.591 4.5,45.25 43,93.25 95.5,93.25 41.409,93.909 44.591,93.909 93.909,93.909 97.091,93.909 40.75,95.5 45.25,95.5 93.25,95.5 97.75,95.5 41.409,97.091 44.591,97.091 93.909,97.091 97.091,97.091 43,97.75 95.5,97.75

## Polygon pours and split planes (outlines as drawn)
USB_GND on BOT-SIG "USB_GND_L04_P003" (solid, remove dead copper, pour order 3): 12.819,31.44 cw(c11.374,31.376) 11.36,29.93 0.09,29.93 0,30.02 0,0 21.15,0 21.14,31.11 20.905,31.44
GND on BOT-SIG "GND_L04_P000" (solid, remove dead copper, pour order 0): 0,47.66 0,30.75 11.25,30.75 12.75,32.25 21.16,32.25 22.15,31.26 22,31.11 22,0 22.09,0.09 100.29,0.09 100.29,100.13 100.28,100.14 100.24,100.1 38.35,100.1 38.35,51.85 34.16,47.66
USB_GND on TOP-SIG "USB_GND_L01_P002" (solid, remove dead copper, pour order 2): 12.819,31.44 cw(c11.374,31.376) 11.36,29.93 0.09,29.93 0,30.02 0,0 21.15,0 21.14,31.11 20.905,31.44
GND on TOP-SIG "GND_L01_P001" (solid, remove dead copper, pour order 1): -0.034,47.689 -0.034,30.779 11.216,30.779 12.716,32.279 21.126,32.279 22.116,31.289 21.966,31.139 21.966,0.029 22.056,0.119 100.256,0.119 100.256,100.159 100.246,100.169 100.206,100.129 38.316,100.129 38.316,51.879 34.126,47.689
USB_GND on GND2 (split plane): 20.85,31.892 20.968,31.868 21.082,31.829 21.19,31.776 21.29,31.709 21.38,31.63 21.459,31.54 21.526,31.44 21.579,31.332 21.618,31.218 21.642,31.1 21.649,30.987 21.648,30.98 21.648,0.75 21.655,0.681 21.675,0.615 21.708,0.555 21.744,0.51 4.5,0.51 4.484,0.509 4.239,0.517 3.979,0.543 3.721,0.585 3.467,0.644 3.217,0.72 2.972,0.812 2.735,0.92 2.504,1.043 2.282,1.181 2.07,1.333 1.868,1.499 1.678,1.678 1.499,1.868 1.333,2.07 1.181,2.282 1.043,2.504 0.92,2.735 0.812,2.972 0.72,3.217 0.644,3.467 0.585,3.721 0.543,3.979 0.517,4.239 0.509,4.484 0.51,4.5 0.51,9.025 0.51,9.031 0.516,9.06 0.536,9.089 0.565,9.109 0.594,9.115 0.6,9.115 0.775,9.115 0.787,9.116 0.913,9.123 1.05,9.146 1.183,9.184 1.311,9.237 1.432,9.304 1.545,9.384 1.648,9.477 1.741,9.58 1.821,9.693 1.888,9.814 1.941,9.942 1.979,10.075 2.002,10.212 2.009,10.338 2.01,10.35 2.01,16.575 2.009,16.587 2.002,16.713 1.979,16.85 1.941,16.983 1.888,17.111 1.821,17.232 1.741,17.345 1.648,17.448 1.545,17.541 1.432,17.621 1.311,17.688 1.183,17.741 1.05,17.779 0.913,17.802 0.787,17.809 0.775,17.81 0.6,17.81 0.594,17.81 0.565,17.816 0.536,17.836 0.516,17.865 0.51,17.894 0.51,17.9 0.51,30.398 11.25,30.398 11.401,30.406 11.551,30.432 11.697,30.474 11.837,30.532 11.969,30.605 12.093,30.693 12.206,30.794 12.307,30.907 12.395,31.031 12.468,31.163 12.526,31.303 12.568,31.449 12.594,31.599 12.602,31.75 12.602,31.752 12.606,31.788 12.621,31.824 12.645,31.855 12.676,31.879 12.712,31.894 12.748,31.898 12.75,31.898 20.73,31.898 20.737,31.899
GND on GND2 (split plane): 201 vertices, not listed, extent 0.509,0.509 99.491,99.491
USB_GND on GND1 (split plane): 20.85,31.892 20.968,31.868 21.082,31.829 21.19,31.776 21.29,31.709 21.38,31.63 21.459,31.54 21.526,31.44 21.579,31.332 21.618,31.218 21.642,31.1 21.649,30.987 21.648,30.98 21.648,0.75 21.655,0.681 21.675,0.615 21.708,0.555 21.744,0.51 4.5,0.51 4.484,0.509 4.239,0.517 3.979,0.543 3.721,0.585 3.467,0.644 3.217,0.72 2.972,0.812 2.735,0.92 2.504,1.043 2.282,1.181 2.07,1.333 1.868,1.499 1.678,1.678 1.499,1.868 1.333,2.07 1.181,2.282 1.043,2.504 0.92,2.735 0.812,2.972 0.72,3.217 0.644,3.467 0.585,3.721 0.543,3.979 0.517,4.239 0.509,4.484 0.51,4.5 0.51,9.025 0.51,9.031 0.516,9.06 0.536,9.089 0.565,9.109 0.594,9.115 0.6,9.115 0.775,9.115 0.787,9.116 0.913,9.123 1.05,9.146 1.183,9.184 1.311,9.237 1.432,9.304 1.545,9.384 1.648,9.477 1.741,9.58 1.821,9.693 1.888,9.814 1.941,9.942 1.979,10.075 2.002,10.212 2.009,10.338 2.01,10.35 2.01,16.575 2.009,16.587 2.002,16.713 1.979,16.85 1.941,16.983 1.888,17.111 1.821,17.232 1.741,17.345 1.648,17.448 1.545,17.541 1.432,17.621 1.311,17.688 1.183,17.741 1.05,17.779 0.913,17.802 0.787,17.809 0.775,17.81 0.6,17.81 0.594,17.81 0.565,17.816 0.536,17.836 0.516,17.865 0.51,17.894 0.51,17.9 0.51,30.494 0.555,30.458 0.615,30.425 0.681,30.405 0.75,30.398 11.25,30.398 11.401,30.406 11.551,30.432 11.697,30.474 11.837,30.532 11.969,30.605 12.093,30.693 12.206,30.794 12.307,30.907 12.395,31.031 12.468,31.163 12.526,31.303 12.568,31.449 12.594,31.599 12.602,31.75 12.602,31.752 12.606,31.788 12.621,31.824 12.645,31.855 12.676,31.879 12.712,31.894 12.748,31.898 12.75,31.898 20.73,31.898 20.737,31.899
GND on GND1 (split plane): 205 vertices, not listed, extent 0.509,0.509 99.491,99.491

## Keep-outs
Keep-Out Layer:
  lines w0.051: 0,4.5 ccw(c4.5,4.5) 4.5,0 95.5,0 ccw(c95.5,4.5) 100,4.5 100,95.5 ccw(c95.5,95.5) 95.5,100 43,100 ccw(c43,95.5) 38.5,95.5 38.5,60.75 38.5,52 cw(c34,52) 34,47.5 4.5,47.5 ccw(c4.5,43) 0,43 0,17.9 ccw(c0.6,17.9) 0.6,17.3 0.775,17.3 cw(c0.775,16.575) 1.5,16.575 1.5,10.35 cw(c0.775,10.35) 0.775,9.625 0.6,9.625 ccw(c0.6,9.025) 0,9.025 0,4.5 ; 4.5,57 4.5,57

## Other copper
GND1 (plane layer: these items are gaps in the copper):
  lines w0.7: 0.75,30.75 11.25,30.75 ccw(c11.25,31.75) 12.25,31.75 cw(c12.75,31.75) 12.75,32.25 20.73,32.25 cw(c20.73,30.98) 22,30.98 22,0.75
GND2 (plane layer: these items are gaps in the copper):
  lines w0.7: 0.5,30.75 11.25,30.75 ccw(c11.25,31.75) 12.25,31.75 cw(c12.75,31.75) 12.75,32.25 20.73,32.25 cw(c20.73,30.98) 22,30.98 22,0.75

## Silkscreen, mask and mechanical layers (free items; w line width, h text height)
Top Overlay:
  lines w0.051: 0.75,48.25 ccw(c0.75,48.25) 0.75,48.25
  lines w0.7: 0.75,30.75 11.25,30.75 ccw(c11.25,31.75) 12.25,31.75 cw(c12.75,31.75) 12.75,32.25 20.73,32.25 cw(c20.73,30.98) 22,30.98 22,0.75 ; 22,0.75 ccw(c22,0.75) 22,0.75
  lines w1.7: 36.5,47.5 99.25,47.5
  text "-2.5V" at 31.764,43.825 h1
  text "EEG Measurement Circuit ver 2.0 / Designed by Giang Phan Truong" at 92.5,41.495 h0.89 r270
  text "CH2" at 66.34,39.729 h1
  text "CH1" at 70.465,39.729 h1
  text "+2.5V" at 31.764,38.625 h1
  text "+3.3V" at 31.764,34.5 h1
  text "+5V" at 31.764,17.55 h1
Bottom Overlay:
  drawing of 105 lines, arcs and shapes, not listed
  text "DRL" at 68.127,94.123 h1.27 r180
  text "EEG CH2+" at 49.127,94.108 h1.27 r180
  text "EEG CH2-" at 56.377,94.108 h1.27 r180
  text "EEG CH1+" at 77.127,94.108 h1.27 r180
  text "EEG CH1-" at 84.127,94.108 h1.27 r180
  text "POWER BANK RECOMMENDED FOR BETTER CMRR / MAX. POWER CONSUMTION: 5V200mA" at 9.488,16.74 h0.89 r270
  text "SERIAL WIRE" at 42.531,8.043 h1
  text "Scan me!" at 76.881,6.022 h0.89 r270
  text "DIO" at 35.075,2.438 h1 r270
  text "CLK" at 37.025,2.438 h1 r270
  text "DO" at 38.975,2.438 h1 r270
  text "+3.3" at 40.925,2.438 h1 r270
  text "GND" at 42.875,2.438 h1 r270
Top Solder:
  lines w1.7: 0.75,4.5 ccw(c4.5,4.5) 4.5,0.75 ; 0.75,31.25 0.75,43 ; 4.5,46.75 33.879,46.75 ccw(c33.879,52.121) 39.25,52.121 39.25,54 39.25,95.5 ; 22,0.75 95.5,0.75 ccw(c95.5,4.5) 99.25,4.5 99.25,95.5 ccw(c95.5,95.5) 95.5,99.25 43,99.25
Bottom Solder:
  lines w1.7: 0.75,4.5 ccw(c4.5,4.5) 4.5,0.75 ; 0.75,43 0.75,30.75 11.187,30.75 ccw(c11.187,31.529) 11.966,31.529 cw(c12.716,31.529) 12.716,32.279 20.73,32.279 cw(c20.73,31.009) 22,31.009 22,0.75 95.5,0.75 ccw(c95.5,4.5) 99.25,4.5 99.25,95.5 ccw(c95.5,95.5) 95.5,99.25 43,99.25 ; 4.5,46.75 33.876,46.75 ccw(c33.876,52.13) 39.256,52.13 cw(c39.256,52.137) 39.25,52.137 39.25,95.5

## Text inside footprints (layer, text, board x,y; h text height)
D100: Top Overlay "+" at 8.91,32.147 h0.76 r90
D102: Top Overlay "+" at 8.907,33.836 h0.76 r90
D103: Top Overlay "+" at 8.897,35.572 h0.76 r90
D104: Top Overlay "+" at 8.87,37.272 h0.76 r90
D500: Top Overlay "+" at 47.319,18.789 h0.76 r270
J100: Mechanical 13 "PCB EDGE" at 0.375,17.802 h0.41 r270
U101: Mechanical 13 "*" at 21.995,34.592 h1.27
U400: Mechanical 13 "*" at 68.211,30.111 h1.27 r315
U600: Mechanical 13 "*" at 18.642,29.164 h1.27